# EAGLE board kinx (EAGLE 8.4.3)
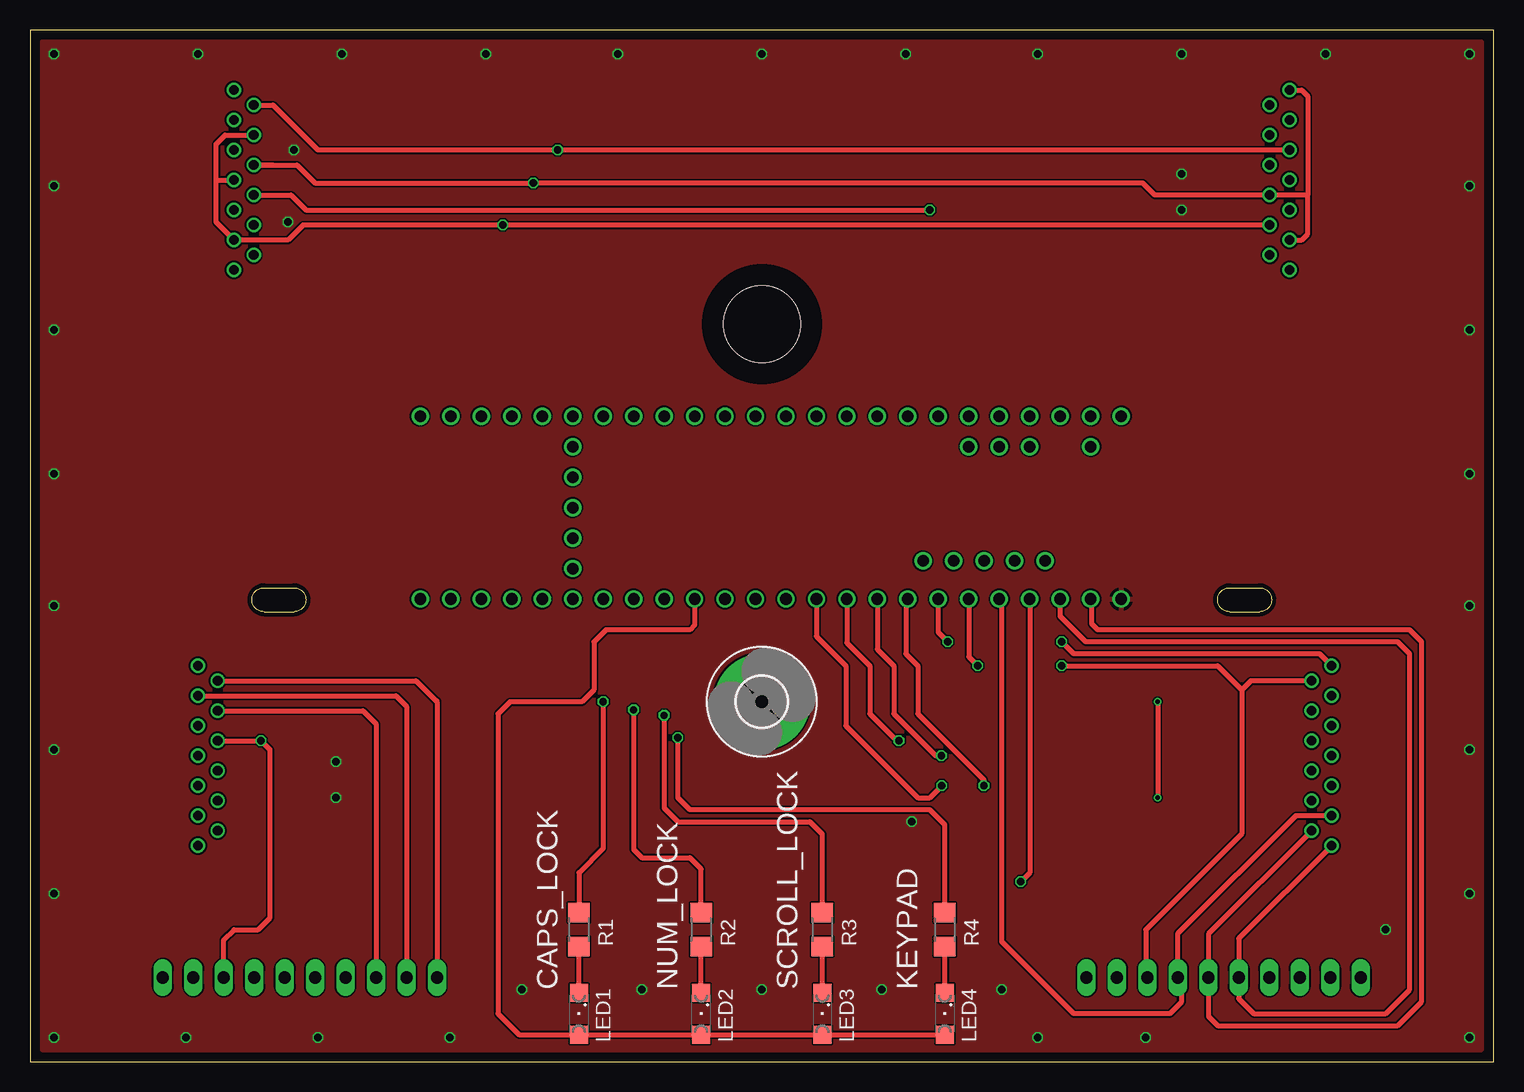
[diagram p0: board, top side]
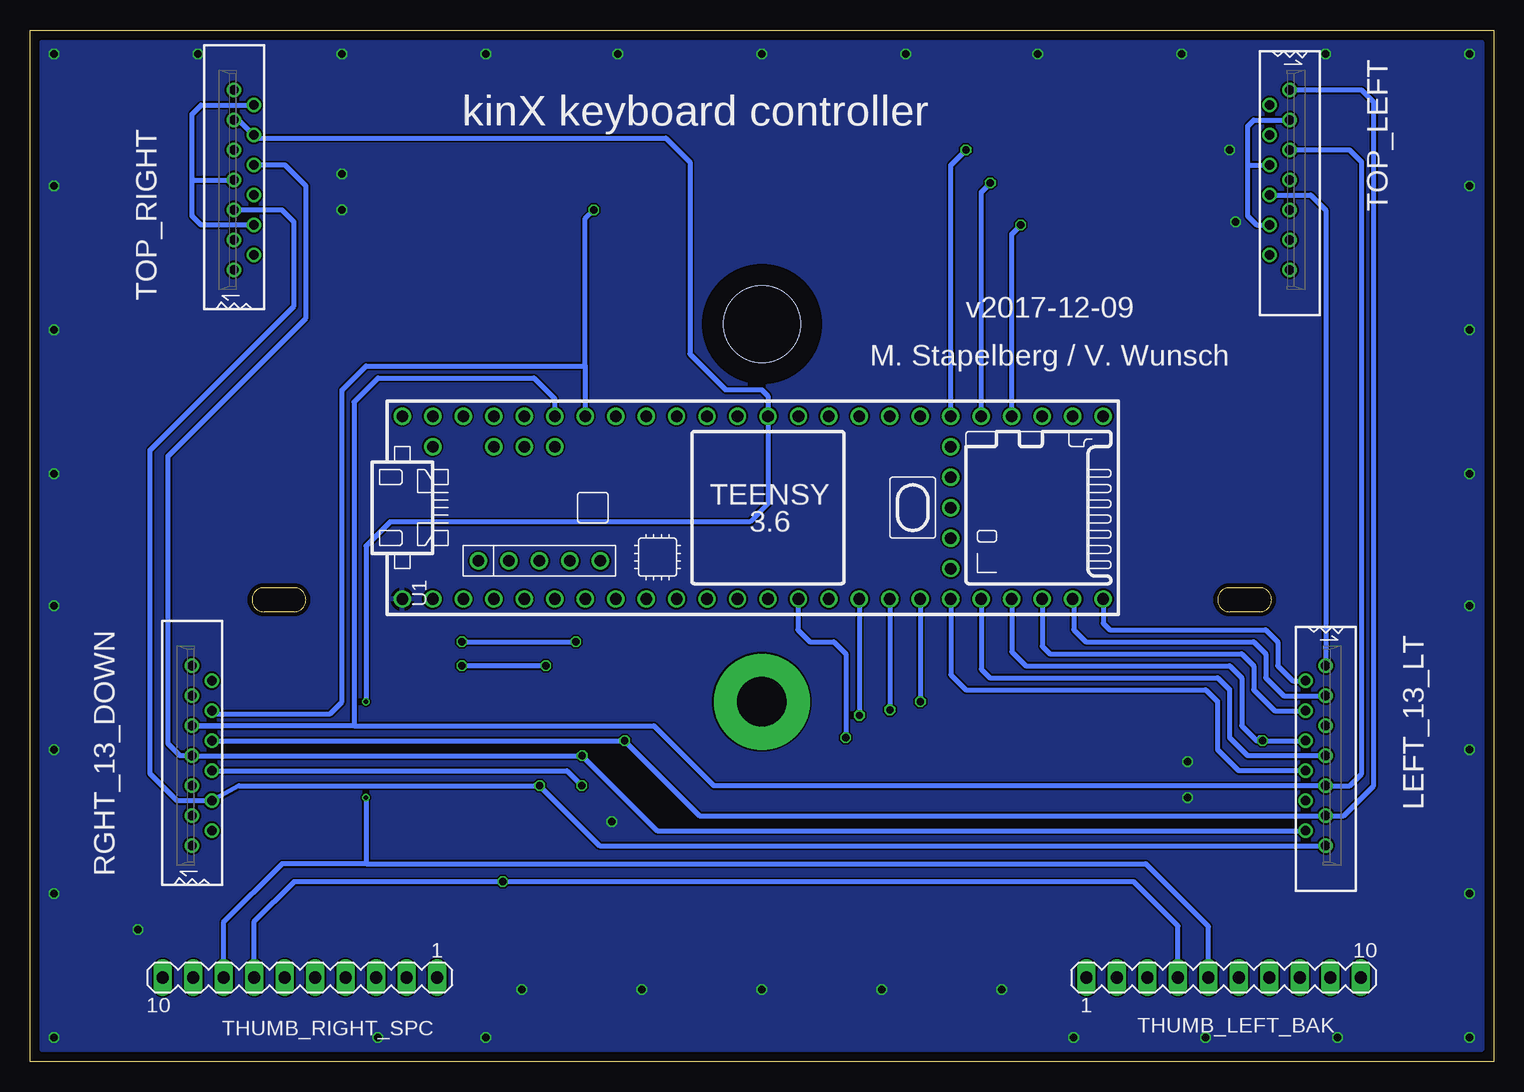
[diagram p1: board, bottom side, seen from below]

Size 122 x 86 mm. Coordinates in mm from the lower left corner, seen from the top.
Outline: 0,0 122,0 122,86 0,86 0,0
Outline: 19.5,37.5 22,37.5 arc90 23,38.5 arc90 22,39.5 19.5,39.5 arc90 18.5,38.5 arc90 19.5,37.5
Outline: 100,37.5 102.5,37.5 arc90 103.5,38.5 arc90 102.5,39.5 100,39.5 arc90 99,38.5 arc90 100,37.5
Copper layers (1*16): Top 0.035559375mm / dielectric 1.6mm / Bottom 0.035559375mm
Design rules "oshpark-2layer": minimum track width 6mil, minimum drill 10mil, track to track 6mil, track to pad 6mil, pad to pad 6mil, via to via 6mil, smd to smd 6mil, copper to edge 15mil, drill to drill 6mil, minimum pad ring 5mil, minimum via ring 5mil, stop-mask expansion 2.5mil, vias tented up to drill 0mil, thermal gap 10mil
Holes 6.4 mm at 61,61.5
tKeepout: area 56,56.5 to 66,66.5
bKeepout: area 56,56.5 to 66,66.5
tRestrict: area 56,56.5 to 66,66.5
bRestrict: area 56,56.5 to 66,66.5
vRestrict: area 56,56.5 to 66,66.5

## Footprints (pad centres in the part's own frame; a part is rotated, then mirrored left to right if it is on the bottom)
4,1-PAD = drill 4.1 pad 8: B4,1 0,0
SML1206 = smd 1.5 x 1.5: A 1.75,0; C -1.75,0
39-53-2135 = drill 0.8: P$1 -7.5,0; P$2 -6.25,-1.65; P$3 -5,0; P$4 -3.75,-1.65; P$5 -2.5,0; P$6 -1.25,-1.65; P$7 0,0; P$8 1.25,-1.65; P$9 2.5,0; P$10 3.75,-1.65; P$11 5,0; P$12 6.25,-1.65; P$13 7.5,0
R1206 = smd 1.6 x 1.803: 1 -1.422,0; 2 1.422,0
MA10-1 = drill 1.016 long: 1 -11.43,0; 2 -8.89,0; 3 -6.35,0; 4 -3.81,0; 5 -1.27,0; 6 1.27,0; 7 3.81,0; 8 6.35,0; 9 8.89,0; 10 11.43,0
TEENSY_3.5/3.6 = drill 0.965: 0/RX -25.4,-7.62; 1/TX -22.86,-7.62; 2 -20.32,-7.62; 3/CANTX -17.78,-7.62; 3V3 7.62,-7.62; 3V3_2 17.78,-2.54; 3V3_LO -22.86,7.62; 4/CANRX -15.24,-7.62; 5 -12.7,-7.62; 6 -10.16,-7.62; 7 -7.62,-7.62; 8 -5.08,-7.62; 9/CS -2.54,-7.62; 10/CS 0,-7.62; 11/MOSI 2.54,-7.62; 12/MISO 5.08,-7.62; 13/SCK 5.08,7.62; 14/A0 2.54,7.62; 15/A1 0,7.62; 16/A2 -2.54,7.62; 17/A3 -5.08,7.62; 18/A4/SDA -7.62,7.62; 19/A5/SCL -10.16,7.62; 20/A6 -12.7,7.62; 21/A7 -15.24,7.62; 21/DAC0 12.7,7.62; 22/A8 -17.78,7.62; 23/A9 -20.32,7.62; 24 10.16,-7.62; 25 12.7,-7.62; 26 15.24,-7.62; 27 17.78,-7.62; 28 20.32,-7.62; 29 22.86,-7.62; 30 25.4,-7.62; 31/A12 27.94,-7.62; 32/A13 30.48,-7.62; 33/A14 30.48,7.62; 34/A15 27.94,7.62; 35/A16 25.4,7.62; 36/A17 22.86,7.62; 37/A18 20.32,7.62; 38/A19 17.78,7.62; 39/A20 15.24,7.62; A10 -17.78,5.08; A11 -15.24,5.08; A22/DAC1 10.16,7.62; AGND -25.4,7.62; AREF -20.32,5.08; GND -27.94,-7.62; GND2 7.62,7.62; GND3 17.78,0; PROG 17.78,2.54; RESET 17.78,5.08; U5V -21.59,-4.445; UD+ -16.51,-4.445; UD- -19.05,-4.445; UGND1 -13.97,-4.445; UGND2 -11.43,-4.445; VBAT 17.78,-5.08; VIN -27.94,7.62; VUSB -25.4,5.08

## Placement (x,y rotation side)
H1  MOUNT-PAD-ROUND4.1  [4,1-PAD]  61,30 0 top
LED1  [SML1206]  45.75,4 270 top
LED2  [SML1206]  55.95,4 270 top
LED3  [SML1206]  66.05,4 270 top
LED4  [SML1206]  76.25,4 270 top
LEFT_13_LT  39-53-2355  [39-53-2135]  14,25.5 270 bottom
R1  [R1206]  45.75,11 90 top
R2  [R1206]  55.95,11 90 top
R3  [R1206]  66.05,11 90 top
R4  [R1206]  76.25,11 90 top
RGHT_13_DOWN  39-53-2355  [39-53-2135]  108.5,25.5 90 bottom
THUMB_LEFT_BAK  [MA10-1]  22.5,7 0 bottom
THUMB_RIGHT_SPC  [MA10-1]  99.5,7 180 bottom
TOP_LEFT  39-53-2355  [39-53-2135]  17,73.5 270 bottom
TOP_RIGHT  39-53-2355  [39-53-2135]  105,73.5 90 bottom
U1  TEENSY_3.5/3.6  [TEENSY_3.5/3.6]  63.02,46.18 0 bottom

## Library data of the parts
H1 = holes
LED1-LED4 = led
LEFT_13_LT RGHT_13_DOWN TOP_LEFT TOP_RIGHT = con-molex-39-53
R1-R4 = rcl
THUMB_LEFT_BAK THUMB_RIGHT_SPC = con-lstb; OC_FARNELL: unknown; OC_NEWARK: unknown
U1 = Teensy356

## Nets
3V3: LED1.A LED2.A LED3.A LED4.A U1.3V3
COL0: LEFT_13_LT.P$1 RGHT_13_DOWN.P$10 TOP_LEFT.P$8 U1.20/A6
COL1: LEFT_13_LT.P$9 RGHT_13_DOWN.P$9 TOP_LEFT.P$5 U1.21/A7
COL2: LEFT_13_LT.P$11 RGHT_13_DOWN.P$8 TOP_LEFT.P$1 U1.8
COL3: LEFT_13_LT.P$12 RGHT_13_DOWN.P$7 TOP_RIGHT.P$8 U1.7
COL4: LEFT_13_LT.P$13 RGHT_13_DOWN.P$4 TOP_RIGHT.P$5 U1.6
COL5: THUMB_LEFT_BAK.5 THUMB_RIGHT_SPC.8 TOP_RIGHT.P$10 TOP_RIGHT.P$11 U1.14/A0
COL6: THUMB_LEFT_BAK.4 THUMB_RIGHT_SPC.7 U1.2
GND: U1.GND
N$7: R4.2 U1.12/MISO
N$8: R3.2 U1.24
N$9: R2.2 U1.25
N$10: R1.2 U1.26
N$14: LED4.C R4.1
N$15: LED3.C R3.1
N$16: LED2.C R2.1
N$17: LED1.C R1.1
ROW_0: RGHT_13_DOWN.P$13 U1.5
ROW_1: LEFT_13_LT.P$7 U1.28
ROW_2: LEFT_13_LT.P$6 THUMB_LEFT_BAK.8 U1.29
ROW_3: LEFT_13_LT.P$4 THUMB_LEFT_BAK.3 U1.30
ROW_4: LEFT_13_LT.P$3 THUMB_LEFT_BAK.2 U1.31/A12
ROW_5: LEFT_13_LT.P$2 THUMB_LEFT_BAK.1 U1.32/A13
ROW_6: RGHT_13_DOWN.P$1 THUMB_RIGHT_SPC.6 U1.1/TX
ROW_7: RGHT_13_DOWN.P$3 THUMB_RIGHT_SPC.4 U1.3/CANTX
ROW_8: RGHT_13_DOWN.P$2 THUMB_RIGHT_SPC.5 U1.0/RX
ROW_9: RGHT_13_DOWN.P$12 THUMB_RIGHT_SPC.3 U1.4/CANRX
ROW_EQL: LEFT_13_LT.P$8 U1.27
ROW_ESC: TOP_LEFT.P$2 TOP_RIGHT.P$9 U1.38/A19
ROW_F1: TOP_LEFT.P$3 TOP_LEFT.P$6 TOP_LEFT.P$10 TOP_RIGHT.P$3 TOP_RIGHT.P$6 TOP_RIGHT.P$13 U1.37/A18
ROW_F2: TOP_LEFT.P$4 TOP_LEFT.P$7 TOP_LEFT.P$11 TOP_RIGHT.P$4 TOP_RIGHT.P$7 TOP_RIGHT.P$12 U1.36/A17
ROW_MIN: RGHT_13_DOWN.P$6 U1.9/CS

## Tracks (layer width: path | path; a pad name or v marks a point on that pad's centre or on a via)
3V3
  Top 0.406: LED4.A LED3.A LED2.A LED1.A 40.77,2.23 39,4 39,29 40,30 46,30 47,31 47,35 48,36 55,36 55.4,36.4 U1.3V3
COL0  (via drill 0.6)
  Top 0.406: TOP_LEFT.P$8 21.75,72.25 23,71 v75,71
  Bottom 0.406: v75,71 75.72,70.28 75.72,58 | 75.72,58 U1.20/A6 | RGHT_13_DOWN.P$10 106.6,29 97,29 96,30 96,56 94,58 75.72,58 | TOP_LEFT.P$8 15.25,72.25 14,71 LEFT_13_LT.P$1
COL1
  Bottom 0.406: 95,28 70,28 65,23 LEFT_13_LT.P$9 12,23 11,24 11,75 12,76 TOP_LEFT.P$5 | 95,28 RGHT_13_DOWN.P$9 106,28 | U1.21/A7 78.26,55.26 80,57 93,57 95,55 95,28
COL2  (via drill 0.6)
  Top 0.406: v72.43,26.75 72.43,27 72,27 70,29 70,33 68.1,34.9 U1.8
  Bottom 0.406: RGHT_13_DOWN.P$8 v72.43,26.75 | 72.25,26.75 v72.43,26.75 | TOP_LEFT.P$1 11,81 10,80 10,23 12.5,20.5 LEFT_13_LT.P$11 66.18,20.5 v72.43,26.75
COL3  (via drill 0.6)
  Top 0.406: U1.7 70.64,34.36 72,33 72,29 75.5,25.5 v75.97,25.5
  Bottom 0.406: TOP_RIGHT.P$8 100.75,74.75 99,73 99,62 110.5,50.5 110.5,26.5 109.5,25.5 RGHT_13_DOWN.P$7 v75.97,25.5 69.72,19.25 LEFT_13_LT.P$12
COL4  (via drill 0.6)
  Top 0.406: U1.6 73,38.38 73,34 74,33 74,29 79.51,23.49 v79.51,23
  Bottom 0.406: v79.51,23 104.6,23 RGHT_13_DOWN.P$4 109.75,21.75 112,24 112,51 100,63 100,70 101,71 TOP_RIGHT.P$5 | v79.5,23 v79.51,23 | v79.51,23 74.51,18 LEFT_13_LT.P$13
COL5  (via drill 0.35)
  Top 0.406: v94,30 v94,22
  Bottom 0.406: THUMB_RIGHT_SPC.8 105.85,11.65 101,16.5 94,16.5 | 94,16.5 29,16.5 23.77,11.27 THUMB_LEFT_BAK.5 | TOP_RIGHT.P$11 104.6,78.5 TOP_RIGHT.P$10 103.1,77 69,77 67,75 67,59 64,56 61,56 60.48,55.48 U1.14/A0 60.48,46.52 62,45 92,45 94,43 v94,30 | v94,22 94,16.5
COL6  (via drill 0.6)
  Top 0.406: U1.2 83.34,15.75 v82.59,15
  Bottom 0.406: THUMB_LEFT_BAK.4 26.31,11.31 30,15 v82.59,15 100,15 103.31,11.69 THUMB_RIGHT_SPC.7
GND  (via drill 0.6)
  other vias: 2,2 120,2 120,84 2,84 61,84 61,6 71,6 51,6 41,6 81,6 24,2 35,2 13,2 93,2 84,2 26,84 38,84 14,84 73,84 49,84 96,84 84,84 108,84 120,61 120,73 120,49 120,26 120,38 120,14 2,26 2,38 2,14 2,61 2,73 2,49 22,76 96,74 21.5,70 96,71 113,11 25.5,25 25.5,22 73.5,20
  pour Top: 1,85 1,1 121,1 121,85
  pour Bottom: 1,85 1,1 121,1 121,85
N$7  (via drill 0.6)
  Top 0.406: R4.2 76.25,19.75 75,21 55,21 54,22 v54,27
  Bottom 0.406: U1.12/MISO 58,38.5 58,36 57,35 55,35 54,34 v54,27
N$8  (via drill 0.6)
  Top 0.406: R3.2 66.05,18.95 65,20 54,20 52.86,21.14 v52.86,28.86
  Bottom 0.406: U1.24 v52.86,28.86
N$9  (via drill 0.6)
  Top 0.406: R2.2 55.95,16.05 55,17 51,17 50.32,17.68 v50.32,29.32
  Bottom 0.406: U1.25 v50.32,29.32
N$10  (via drill 0.6)
  Top 0.406: 46,12.67 R1.2 45.75,15.75 47.78,17.78 v47.78,30
  Bottom 0.406: U1.26 v47.78,30 47.78,29.78
N$14
  Top 0.406: LED4.C R4.1
N$15
  Top 0.406: LED3.C R3.1
N$16
  Top 0.406: LED2.C R2.1
N$17
  Top 0.406: LED1.C R1.1
ROW_0  (via drill 0.6)
  Top 0.406: RGHT_13_DOWN.P$13 107.5,34 87,34 v86,35 | v76.5,35 75.72,35.78 U1.5
  Bottom 0.406: v86,35 v76.5,35
ROW_1
  Bottom 0.406: U1.28 42.7,32.7 42,32 23,32 22,31 22,27 20.5,25.5 LEFT_13_LT.P$7
ROW_2  (via drill 0.6)
  Top 0.406: THUMB_LEFT_BAK.8 16.15,10.15 17,11 19,11 20,12 20,26 v19.25,26.75 LEFT_13_LT.P$6
  Bottom 0.406: v19.25,26.75 19.5,27 | LEFT_13_LT.P$6 19.75,26.75 21,28 21,32 22,33 39,33 40.16,34.16 U1.29
ROW_3
  Top 0.406: THUMB_LEFT_BAK.3 28.85,28.15 27.75,29.25 LEFT_13_LT.P$4
  Bottom 0.406: U1.30 37.62,34.62 37,34 21,34 20,33 20,31 18.25,29.25 LEFT_13_LT.P$4
ROW_4
  Top 0.406: THUMB_LEFT_BAK.2 31.39,29.61 30.5,30.5 LEFT_13_LT.P$3
  Bottom 0.406: U1.31/A12 35,38.48 35,36 34,35 20,35 19,34 19,32 17.5,30.5 LEFT_13_LT.P$3
ROW_5
  Top 0.406: 33.93,30 THUMB_LEFT_BAK.1 | 33.93,30 33.93,30.07 | LEFT_13_LT.P$2 32.18,31.75 33.93,30
  Bottom 0.406: U1.32/A13 32.54,36.54 32,36 19,36 18,35 18,33 16.75,31.75 LEFT_13_LT.P$2
ROW_6
  Top 0.406: RGHT_13_DOWN.P$1 100.77,10.27 THUMB_RIGHT_SPC.6 100.77,5.23 102,4 113,4 115,6 115,34 114,35 88,35 85.88,37.12 U1.1/TX
ROW_7
  Top 0.406: RGHT_13_DOWN.P$3 105.5,20.5 95.69,10.69 THUMB_RIGHT_SPC.4 96,6.69 96,5 95,4 87,4 81,10 81,38.36 U1.3/CANTX
ROW_8
  Top 0.406: RGHT_13_DOWN.P$2 98.23,10.63 THUMB_RIGHT_SPC.5 98.23,3.77 99,3 114,3 116,5 116,35 115,36 89,36 88.5,36.5 88.5,38.48 U1.0/RX
ROW_9  (via drill 0.6)
  Top 0.406: 101,31 101.75,31.75 RGHT_13_DOWN.P$12 | THUMB_RIGHT_SPC.3 93,7.15 93,11 101,19 101,31 | U1.4/CANRX 78.26,33.74 v79,33 | v86,33 99,33 101,31
  Bottom 0.406: v79,33 v86,33
ROW_EQL
  Bottom 0.406: U1.27 45.24,32.24 44,31 24,31 23,30 23,26 21.25,24.25 LEFT_13_LT.P$8
ROW_ESC  (via drill 0.6)
  Top 0.406: TOP_RIGHT.P$9 v43.99,76 24,76 20.25,79.75 TOP_LEFT.P$2
  Bottom 0.406: U1.38/A19 45.24,74.75 v43.99,76
ROW_F1  (via drill 0.6)
  Top 0.406: 20.25,74.75 TOP_LEFT.P$6 22.25,74.75 23.75,73.25 v41.95,73.25 92.75,73.25 93.75,72.25 TOP_RIGHT.P$6 | 106.5,72.25 TOP_RIGHT.P$6 | 106.5,72.25 106.5,69 106,68.5 TOP_RIGHT.P$3 | 106.5,72.25 106.5,80.5 106,81 TOP_RIGHT.P$13 | 103.16,72.06 TOP_RIGHT.P$6
  Bottom 0.406: TOP_LEFT.P$10 19.75,69.75 20.5,70.5 20.5,74.75 | 20.5,74.75 TOP_LEFT.P$6 | 20.5,74.75 20.5,78 20,78.5 TOP_LEFT.P$3 | U1.37/A18 42.7,72.5 v41.95,73.25
ROW_F2  (via drill 0.6)
  Top 0.406: TOP_RIGHT.P$4 v39.41,69.75 22.75,69.75 21.5,68.5 TOP_LEFT.P$11 15.5,70 15.5,73.5 | 15.5,73.5 TOP_LEFT.P$7 | 15.5,73.5 15.5,76.5 16.25,77.25 TOP_LEFT.P$4
  Bottom 0.406: TOP_RIGHT.P$4 107.75,69.75 108.5,70.5 108.5,73.5 | 108.5,73.5 TOP_RIGHT.P$7 | 108.5,73.5 108.5,79 107.75,79.75 TOP_RIGHT.P$12 | U1.36/A17 40.16,69 v39.41,69.75
ROW_MIN  (via drill 0.6)
  Top 0.406: U1.9/CS 65.56,35.44 68,33 68,28 74,22 75,22 v76,23
  Bottom 0.406: RGHT_13_DOWN.P$6 77.25,24.25 v76,23

## Text on the board
tNames: CAPS_LOCK | NUM_LOCK | SCROLL_LOCK | KEYPAD
bNames: kinX keyboard controller | v2017-12-09 | M. Stapelberg / V. Wunsch